# Altium PCB pcb.PcbDoc
Units mil, origin at the board's own origin, x right, y up, seen from the top; angles counter-clockwise.
Board outline 5324.52 x 2707.83 mil, 4 copper layers (Top Layer, Internal Plane 1, Internal Plane 2, Bottom Layer); 43 components, 34 nets, 162 pads, 0 vias.
Unrouted connection lines stored in the file: 2.
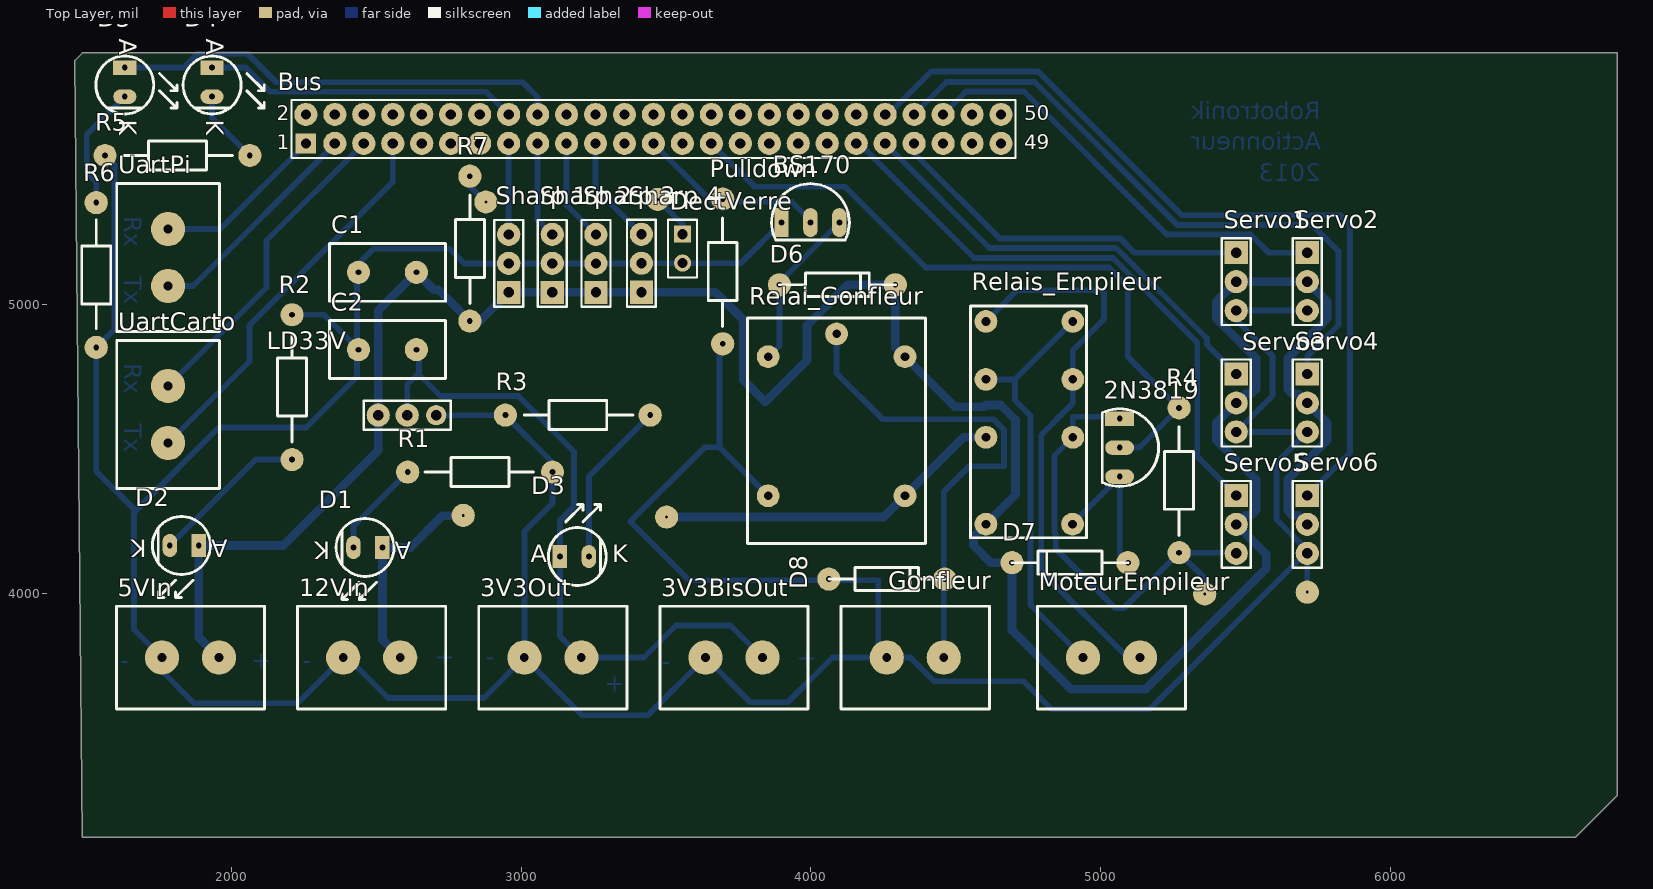
[diagram p0: Top Layer view]
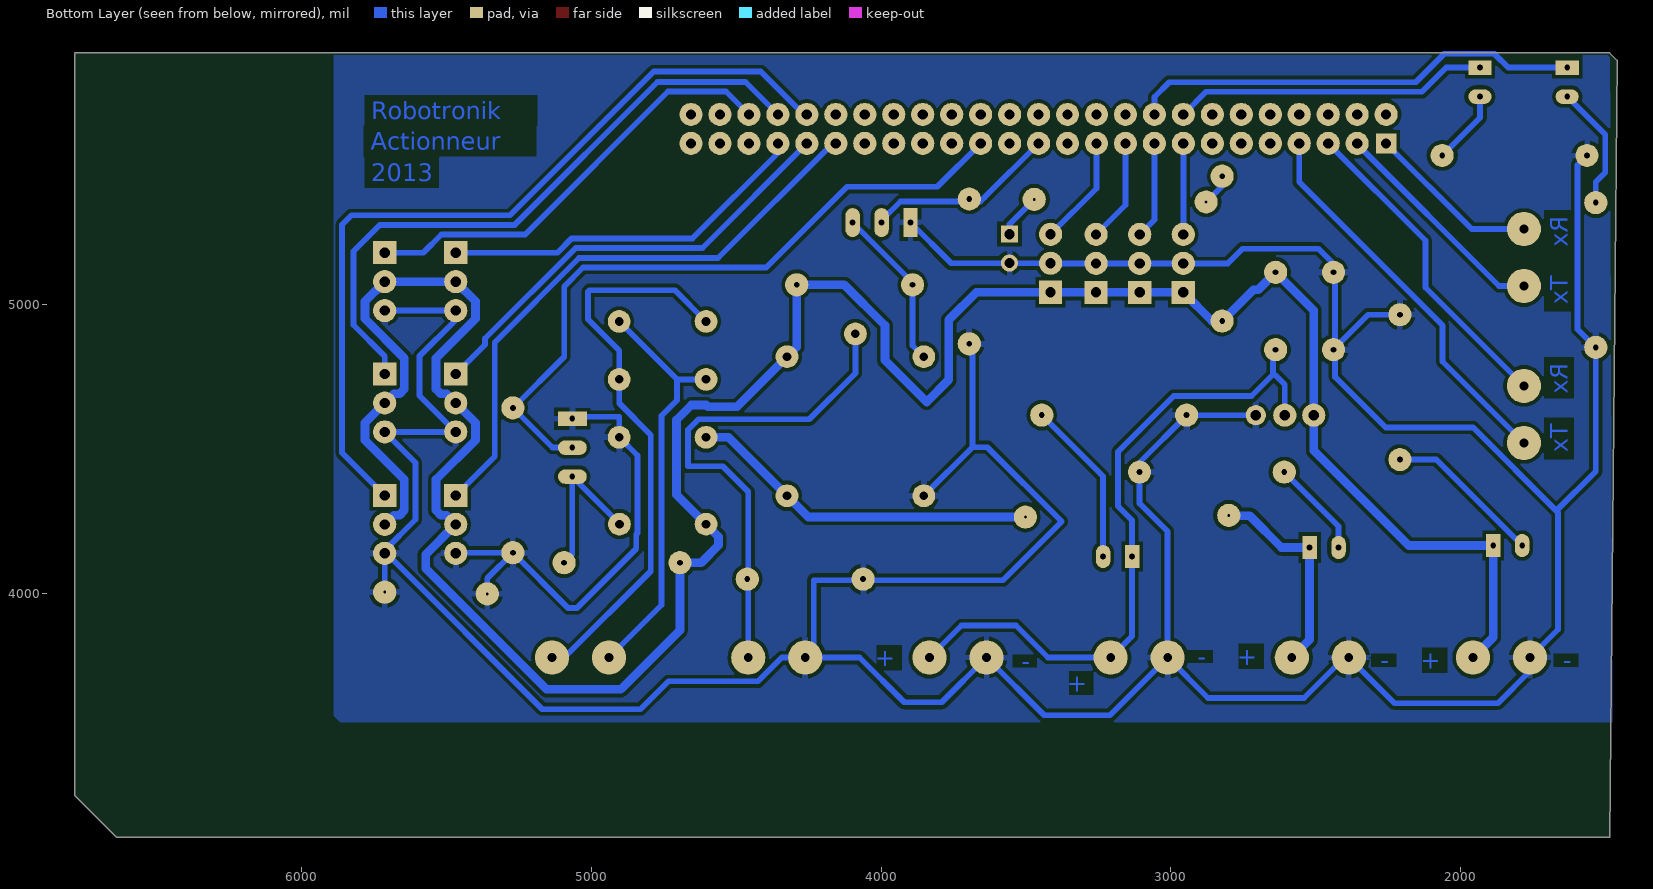
[diagram p1: Bottom Layer view, seen from below]
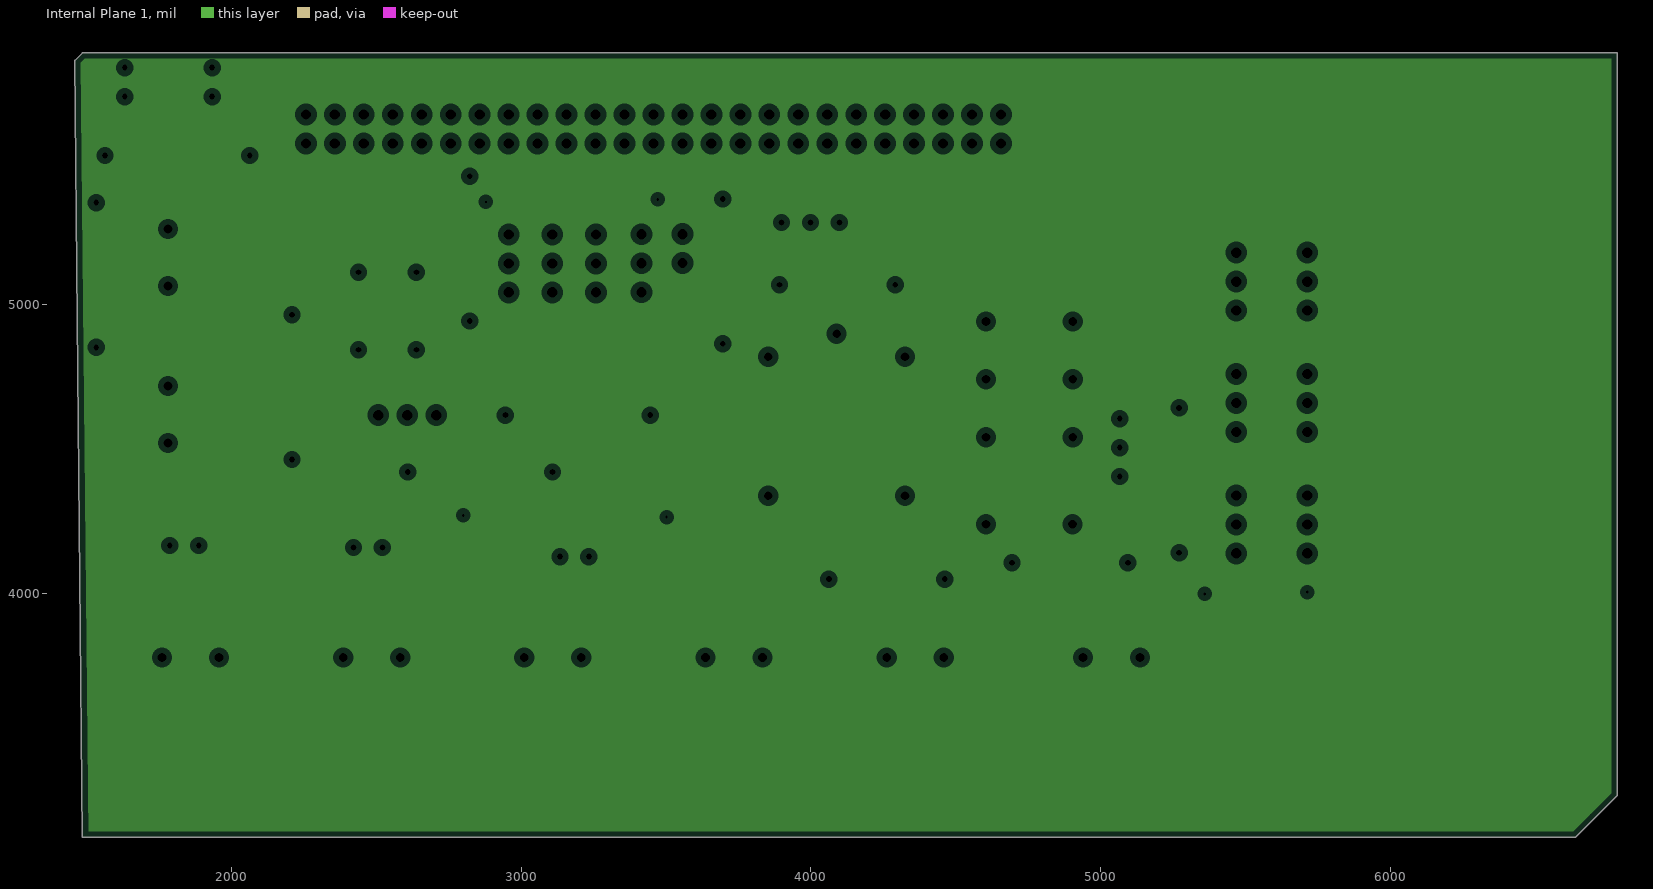
[diagram p2: Internal Plane 1, clearances drawn from the general rule]
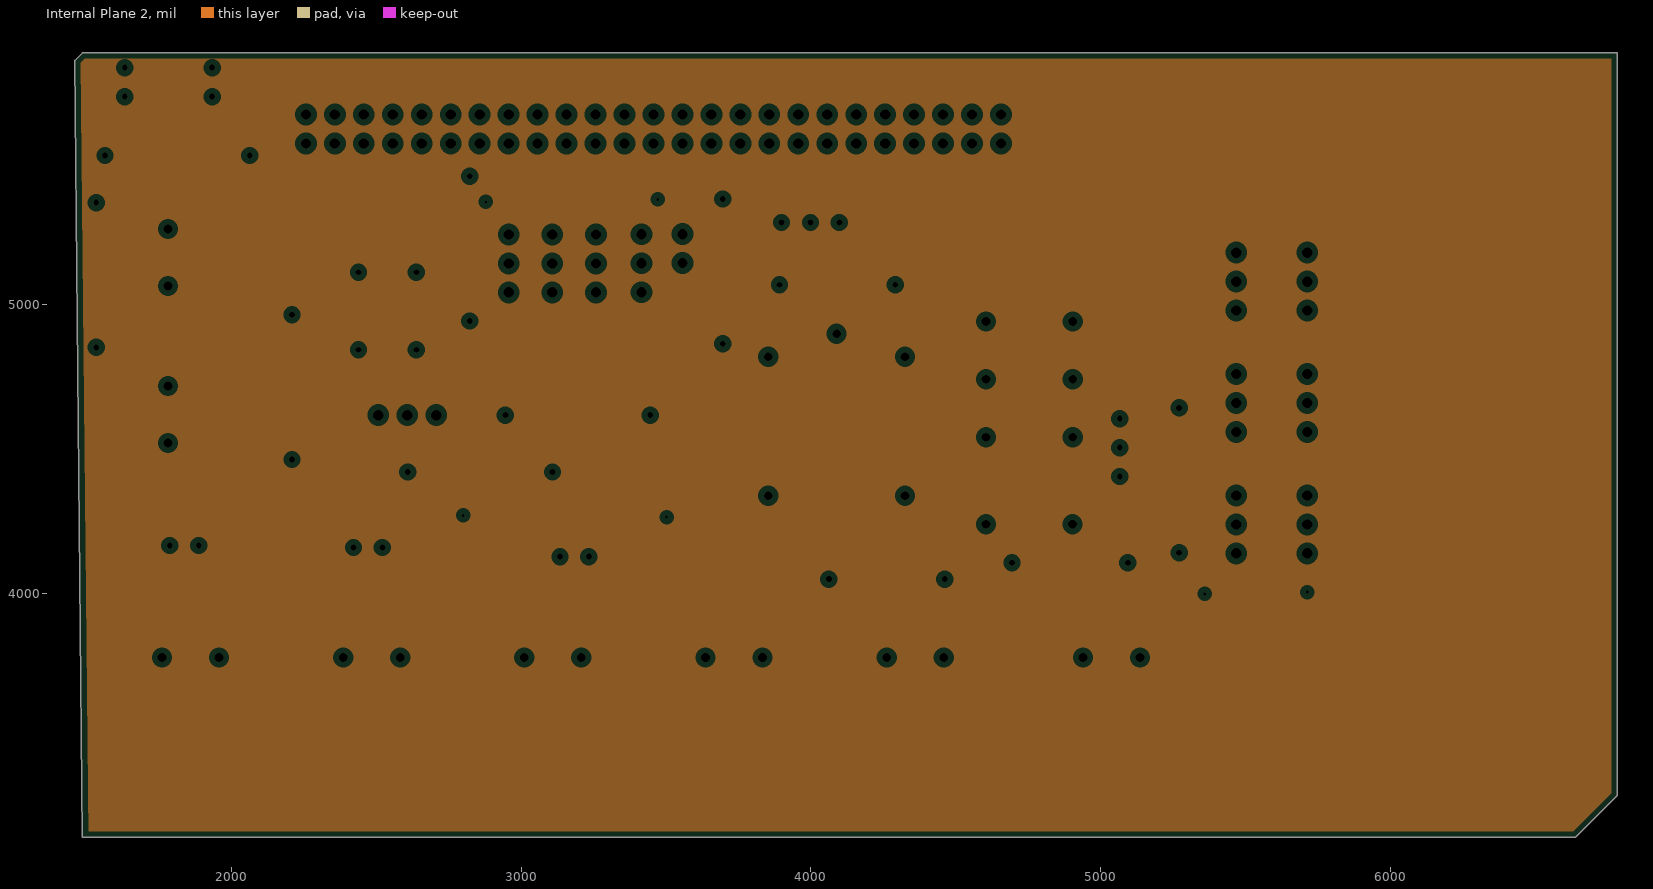
[diagram p3: Internal Plane 2, clearances drawn from the general rule]

## Layer stack, top to bottom
Top Layer: signal copper 1.4
Dielectric: dielectric 12.6, FR-4, Dk 4.8
Internal Plane 1: plane copper 1.4
Dielectric: dielectric 12.6, FR-4, Dk 4.8
Internal Plane 2: plane copper 1.4
Dielectric: dielectric 12.6, FR-4, Dk 4.8
Bottom Layer: signal copper 1.4

## Board outline
1458.72,5841.94 1484.76,5867.99 6783.23,5867.99 6783.23,3303.37 6705.12,3225.26 6640.02,3160.16 1484.75,3160.16

## Design rules (kind name [scope] priority, off if disabled: settings)
Clearance [All] p1: gap=13
FabricationTestPointUsage TestPointUsage [All] p1: valid=0 allowmultiple=FALSE
FabricationTestpoint Testpoint [All] p1: side=3 testpointundercomponent=TRUE minsize=40 maxsize=100 preferedsize=60 minholesize=0 maxholesize=40 preferedholesize=32 testpointgrid=1 allowsidetop=TRUE allowsidebottom=TRUE usegrid=TRUE gridtolerance=0.01
PlaneClearance [All] p1: clearance=20
PlaneConnect [All] p1: planeconnectstyle=Relief reliefexpansion=20 reliefentries=4 reliefconductorwidth=10 reliefairgap=10
PolygonConnect [All] p1: connectstyle=Relief reliefconductorwidth=20 reliefentries=4 polygonreliefangle="90 Angle"
RoutingLayers RoutingLayers_1 [All] p1: top layer_v5=FALSE bottom layer_v5=TRUE
RoutingVias [All] p1: holewidth=20 width=60 viastyle="Through Hole" minholewidth=20 minwidth=60 maxholewidth=20 maxwidth=60
SilkscreenOverComponentPads [All] p1: minsilkscreentomaskgap=10
SolderMaskExpansion [All] p1: expansion=4
Width Width_12V [InNet('12V')] p1: maxlimit=30 minlimit=30 preferedwidth=30
Width Default [Not InNet('12V') and Not InNet('5V')] p2: maxlimit=20 minlimit=20 preferedwidth=20
Width Width_5V [InNet('5V')] p3: maxlimit=30 minlimit=30 preferedwidth=30
22 further rules are at their usual default settings.

## Classes and differential pairs
net class Alim: 3V3 5V 12V GND
component class int-out: 3V3BisOut 3V3Out 5VIn 12VIn Bus D1 D2 D3 D4 D5 D8 DectVerre Gonfleur R1 R2 R3 R5 R6 R7 Servo1 Servo2 Servo3 Servo4 Servo5 Servo6 "Sharp 1" "Sharp 2" "Sharp 3" "Sharp 4" UartCarto UartPi
component class Sheet1: 2N3819 BS170 C1 C2 D6 D7 LD33V MoteurEmpileur Pulldown R4 Relai_Gonfleur Relais_Empileur
net class Undefined: 5V DECTVERRE GND NetDectVerre_1 "RX CARTO" RXPI "SHARP 1" "SHARP 2" "SHARP 3" "SHARP 4" "TX CARTO" TXPI

## Components (designator, comment, footprint, x,y, rotation, side; value= is the part's Value field where it differs from the comment)
2N3819 "2N3904" TO92 5065.88,4605.34 r270 top
3V3BisOut "Bornier" BORNIER 3636.05,3819.74 r0 top
3V3Out "Bornier" BORNIER 3010.47,3819.74 r0 top
5VIn "Bornier" BORNIER 1759.31,3819.74 r0 top
12VIn "Bornier" BORNIER 2384.89,3819.74 r0 top
BS170 "2N3904" TO92 3898.25,5282.42 r0 top
Bus "Header 25X2" HDR2X25 2256.13,5555.48 r0 top
C1 "Cap2" CAPA2 2437.77,5110.5 r0 top
C2 "Cap2" CAPA2 2437.77,4843.5 r0 top
D1 "TSUS5202" LED 2520.45,4160.56 r180 top
D2 "TSUS5202" LED 1886.47,4167.27 r180 top
D3 "TSUS5202" LED 3133.35,4128.97 r0 top
D4 "TSUS5202" LED 1932.3,5817.29 r270 top
D5 "TSUS5202" LED 1630.95,5817.29 r270 top
D6 "Diode 1N4001" Ddiode 4291.24,5067.48 r180 top
D7 "Diode 1N4001" Ddiode 4694.21,4107.85 r0 top
D8 "Diode 1N4001" Ddiode 4461.83,4051.39 r180 top
DectVerre "Header 2" HDR1X2 3556.73,5242.38 r270 top
Gonfleur "Bornier" BORNIER 4261.63,3819.74 r0 top
LD33V "Header 3" HDR1X3#1 2705.99,4617.27 r180 top
MoteurEmpileur "Bornier" Bornier 5136.25,3741 r180 top
Pulldown "Res2" res5_1/4W 3695.2,4863.64 r90 top
R1 "Res2" res5_1/4W 2607.62,4420.93 r0 top
R2 "Res2" res5_1/4W 2208.34,4464.03 r90 top
R3 "Res2" res5_1/4W 3444.95,4617.58 r180 top
R4 "Res2" res5_1/4W 5271,4142.32 r90 top
R5 "Res2" res5_1/4W 2062.63,5513.91 r180 top
R6 "Res2" res5_1/4W 1532.31,5351.14 r270 top
R7 "Res2" res5_1/4W 2822.26,4942.28 r90 top
Relai_Gonfleur "Relai_G5LA" Relai_g5la-1 4324.77,4819.3 r270 top
Relais_Empileur "Relais_MT2C93401" Relais_MT2C93401 4950.93,4194.08 r90 top
Servo1 "Header 3" HDR1X3#2 5468.35,5178.38 r270 top
Servo2 "Header 3" HDR1X3#2 5713.75,5178.37 r270 top
Servo3 "Header 3" HDR1X3#2 5468.35,4759.28 r270 top
Servo4 "Header 3" HDR1X3#2 5713.76,4759.28 r270 top
Servo5 "Header 3" HDR1X3#2 5468.35,4340.19 r270 top
Servo6 "Header 3" HDR1X3#2 5713.76,4340.19 r270 top
"Sharp 1" "Header 3" HDR1X3#2 2956.41,5041.28 r90 top
"Sharp 2" "Header 3" HDR1X3#2 3106.96,5041.28 r90 top
"Sharp 3" "Header 3" HDR1X3#2 3257.51,5041.28 r90 top
"Sharp 4" "Header 3" HDR1X3#2 3414.58,5041.77 r90 top
UartCarto "Bornier" BORNIER 1819.74,4718.26 r270 top
UartPi "Bornier" BORNIER 1819.74,5259.95 r270 top

## Footprints (in the part's own frame and the unit in brackets; to place one, negate y for a bottom-side part, rotate by r counter-clockwise, add the part's x,y. Pads: shape width x height; smd on the part's side, far side on the other; paste and mask are expansions set on the pad)
BORNIER [mm]
  round 3 hole 0.762: 1(0,-1) 2(5,-1)
  silkscreen extent -4,-5.5 9,3.5
Bornier [mm]
  round 3 hole 0.762: 1(0,-1) 2(5,-1)
  silkscreen extent -4,-5.5 9,3.5
CAPA2 [mil]
  round 80 hole 20: 1(0,0) 2(200,0)
  silkscreen extent -100,-100 300,100
Ddiode [mil]
  round 80 hole 20: A(400,0) K(0,0)
  silkscreen extent 0,-40 400,40
HDR1X2 [mm] "Connector; Header; 2 Position"
  rect 1.5x1.5 hole 0.9: 1(0,0)
  round 1.5 hole 0.9: 2(2.54,0)
  silkscreen extent -1.27,-1.27 3.81,1.27
HDR1X3#1 [mil] "Connector; Header; 3 Position"
  round 70 hole 35.43: 1(0,0)
  round 80 hole 35.43: 2(100,0) 3(200,0)
  silkscreen extent -50,-50 250,50
HDR1X3#2 [mil] "Connector; Header; 3 Position"
  rect 80x80 hole 35.43: 1(0,0)
  round 80 hole 35.43: 2(100,0) 3(200,0)
  silkscreen extent -50,-50 250,50
HDR2X25 [mil] "Connector; Header; 25x2 Position"
  rect 70x70 hole 35.43: 1(0,0)
  round 80 hole 35.43: 2(0,100) 3(100,0) 4(100,100) 5(200,0) 6(200,100) 7(300,0) 8(300,100) 9(400,0) 10(400,100) 11(500,0) 12(500,100) 13(600,0) 14(600,100) 15(700,0) 16(700,100) 17(800,0) 18(800,100) 19(900,0) 20(900,100) 21(1000,0) 22(1000,100) 23(1100,0) 24(1100,100) 25(1200,0) 26(1200,100) 27(1300,0) 28(1300,100) 29(1400,0) 30(1400,100) 31(1500,0) 32(1500,100) 33(1600,0) 34(1600,100) 35(1700,0) 36(1700,100) 37(1800,0) 38(1800,100) 39(1900,0) 40(1900,100) 41(2000,0) 42(2000,100) 43(2100,0) 44(2100,100) 45(2200,0) 46(2200,100) 47(2300,0) 48(2300,100) 49(2400,0) 50(2400,100)
  silkscreen extent -50,-50 2450,150
LED [mil]
  rect 50x80 hole 20: 1(0,0)
  oval 50x80 hole 20: 2(100,0)
  silkscreen extent -40,-100 160,180
Relai_g5la-1 [mm]
  round 2 hole 0.762: 1(0,0) 2(-2,-6) 3(0,-12) 4(12.2,-12) 5(12.2,0)
  silkscreen extent -3.4,-13.8 16.4,1.8
Relais_MT2C93401 [mm]
  round 2 hole 0.762: 1(1.19,1.21) 2(8.81,1.19) 3(13.89,1.19) 4(18.97,1.19) 5(18.97,8.81) 6(13.89,8.81) 7(8.81,8.81) 8(1.19,8.81)
  silkscreen extent 0,0 20.32,10.16
res5_1/4W [mil]
  round 80 hole 20: 1(0,0) 2(500,0)
  silkscreen extent 60,-50 435,50
TO92 [mil]
  rect 50x100 hole 20: 1(0,0)
  oval 50x100 hole 20: 2(100,0) 3(200,0)
  silkscreen extent -34,-60 234,134

## Part data
2N3819 BS170: "NPN General Purpose Amplifier"
3V3BisOut 3V3Out 5VIn 12VIn Gonfleur MoteurEmpileur UartCarto UartPi: library part Bornier2
Bus: "Header, 25-Pin, Dual row"
C1 C2: "Capacitor"
D1 D2 D3 D4 D5: "LED_IR"
D6 D7 D8: "1 Amp General Purpose Rectifier"
DectVerre: "Header, 2-Pin"
LD33V Servo1 Servo2 Servo3 Servo4 Servo5 Servo6 "Sharp 1" "Sharp 2" "Sharp 3" "Sharp 4": "Header, 3-Pin"
Pulldown R1 R2 R3 R4 R5 R6 R7: "Resistor"

## Free pads (board coordinates)
  round 80 hole 10: 0(2877.49,5353.36) 1(3471.08,5362.19) 3(3501.46,4265.58) 4(2799.36,4271.07) 6(5713.69,4006.06) 7(5359.5,4000.03)

## Nets (pads, with @x,y where several pads share a name; then routed paths per layer and width w, separated by ;. In a path a pad name is that pad's centre, name@x,y a point inside that pad or via, vN(x,y) a via of type N, cw(c..) or ccw(c..) an arc to the next point about the centre after c; other vN are vias at no path point)
3V3: 3V3BisOut.2 3V3Out.2 C2.2 D3.1 LD33V.2 | length 2365.5
  Bottom Layer w20: LD33V.2 2605.99,4723.11 2638.14,4755.26 ; C2.2 2646.7,4834.57 2646.7,4757.39 2720.79,4683.29 2989.66,4683.29 3182.01,4490.94 3182.01,4303.22 3133.35,4254.57 D3.1 3133.35,3854.34 3V3Out.2 3423.55,3780.37 3534.33,3891.15 3722.13,3891.15 3V3BisOut.2
5V: 5VIn.2 "Sharp 1.1" "Sharp 2.1" "Sharp 3.1" "Sharp 4.1" C1.2 D2.1 D6.K D7.K LD33V.3 R7.1 Relai_Gonfleur.1 Relais_Empileur.8 Servo1.2 Servo2.2 Servo3.2 Servo4.2 Servo5.2 Servo6.2 | length 9525.9
  Bottom Layer w30: 5VIn.2 1886.47,3850.07 D2.1 2178.16,4167.28 2505.99,4495.11 LD33V.3 2505.99,4978.72 C1.2 2697.81,5050.46 2714.08,5050.46 R7.1 2857.41,4942.28 2956.41,5041.29 3106.97,5041.29 3257.52,5041.29 3414.1,5041.29 ; 3414.58,5041.77 3670.53,5041.77 3766.05,4946.26 3766.05,4739.3 3842.44,4662.9 3986.05,4806.51 3986.05,4926.89 4126.64,5067.48 D6.K 4291.24,4852.82 Relai_Gonfleur.1 4497.51,4646.56 4598.73,4646.56 4604.49,4652.31 4654.24,4652.31 4706.08,4600.47 4706.08,4342.92 Relais_Empileur.8 4560.87,4197.71 4560.87,4167.82 4620.83,4107.85 D7.K 4694.21,3874.51 4898.18,3670.54 5154.84,3670.54 5572.29,4088 5572.29,4136.25 Servo5.2 5500.35,4272.19 5519.95,4272.19 5536.35,4288.6 5536.35,4395.12 5400.35,4531.12 5400.35,4591.28 Servo3.2 ; Servo3.2@5468.35,4648.38 Servo3.2 ; Servo1.2@5468.35,5067.47 Servo1.2 ; Servo6.2 5681.76,4272.19 5662.16,4272.19 5645.76,4288.6 5645.76,4395.12 5781.76,4531.12 5781.76,4591.28 Servo4.2 5681.76,4691.28 5662.16,4691.28 5645.76,4707.69 5645.76,4814.21 5781.76,4950.21 5781.76,5010.37 Servo2.2 ; Servo2.2@5713.76,5067.47 Servo2.2 ; Servo3.2 5500.35,4691.28 5519.95,4691.28 5536.35,4707.69 5536.35,4814.21 5400.35,4950.21 5400.35,5010.37 Servo1.2 ; Servo1.2 Servo2.2
12V: 12VIn.2 D1.1 pad.3 pad.4 Relai_Gonfleur.5 Relais_Empileur.7 | length 1946.3
  Bottom Layer w30: 12VIn.2 2520.45,3841.67 D1.1 2617.23,4160.56 2726.7,4270.04 pad.4@2787.82,4270.04 ; pad.3@3489.96,4265.88 4251.67,4265.88 Relai_Gonfleur.5 4526.72,4540.93 Relais_Empileur.7
COMMANDEEMPILEUR: 2N3819.2 Bus.29 R4.2 | length 2396.9
  Bottom Layer w20: Bus.29 3805.89,5405.73 4117.36,5405.73 4396.15,5126.94 5028.74,5126.94 5094.04,5061.65 5094.04,4819.28 R4.2 5134.02,4505.34 2N3819.2
COMMANDEGONFLEUR: BS170.2 Bus.25 Pulldown.2 | length 659.6
  Bottom Layer w20: Bus.25 3456.59,5555.49 3643.27,5368.81 3656.66,5355.42 3932.78,5355.42 3998.25,5289.95 BS170.2
DEBUG1: Bus.16 D4.1 | length 1090.9
  Bottom Layer w20: D4.1 2048.36,5817.29 2131.83,5733.83 2877.79,5733.83 Bus.16
DEBUG2: Bus.18 D5.1 | length 1567.2
  Bottom Layer w20: D5.1 1834.78,5817.29 1882.78,5865.29 2055.36,5865.29 2153.82,5766.83 3004.94,5766.83 3056.13,5715.63 Bus.18
DECTVERRE: Bus.27
GND: 2N3819.1 3V3BisOut.1 3V3Out.1 5VIn.1 12VIn.1 "Sharp 1.2" "Sharp 2.2" "Sharp 3.2" "Sharp 4.2" BS170.1 C1.1 C2.1 D8.A DectVerre.2 Gonfleur.1 LD33V.1 pad.6 pad.7 Pulldown.1 R1.2 R2.2 R3.2 R4.1 R5.2 R6.2 Relai_Gonfleur.4 Relais_Empileur.2 Servo1.3 Servo2.3 Servo3.3 Servo4.3 Servo5.3 Servo6.3 | length 16570.8
  Bottom Layer w20: R5.2 1595.3,5481.23 1595.3,4914.14 R6.2 1532.3,4423.14 1668.36,4287.09 ; R2.2 2318.4,4964.03 C2.1@2432.43,4850 ; LD33V.1 2944.64,4617.27 3107.62,4454.29 R1.2 3107.62,4312.78 3010.47,4215.62 3V3Out.1 ; Pulldown.1@3684.46,4884.42 3684.46,4506.85 ; Relai_Gonfleur.4 3684.46,4506.85 ; BS170.1 3757.6,5141.77 3414.58,5141.77 3414.1,5141.29 3257.52,5141.29 3106.97,5141.29 2956.41,5141.29 2802.92,5141.29 2752.17,5192.04 2489.93,5192.04 2432.43,5134.53 C2.1@2432.43,4850 ; 2N3819.1 5059.7,4611.51 4904.08,4611.51 Relais_Empileur.2 4840.92,4477.77 4840.92,4210.95 4845.07,4206.8 4845.07,4156.48 5050.54,3951 5079.68,3951 R4.1 ; pad.7 5359.5,4053.82 R4.1 ; Servo5.3@5466.22,4142.32 R4.1 ; Servo6.3@5705.91,4140.19 Servo6.3@5707.78,4140.19 ; pad.6 5713.69,4140.13 Servo6.3 ; Servo2.3 Servo1.3 5468.35,4946.27 5593.99,4820.63 5593.99,4684.93 Servo3.3 Servo4.3 5607.76,4453.28 5607.76,4257.1 5713.76,4151.1 Servo6.3 ; 1668.36,4287.09 1955.7,4574.43 2257.31,4574.43 2432.43,4749.55 C2.1@2432.43,4850 ; 1668.36,4287.09 1662.27,4281 1662.27,3877.42 5VIn.1 1759.31,3733.91 1870.29,3622.93 2227.45,3622.93 12VIn.1 2399.54,3780.37 2539.24,3640.68 2870.78,3640.68 3V3Out.1 ; 3V3Out.1 3209.69,3581.15 3436.83,3581.15 3V3BisOut.1 3790.29,3626.14 3919.77,3626.14 4074.01,3780.37 Gonfleur.1 ; 3684.46,4506.85 3632.96,4506.85 3376.48,4250.37 3579.2,4047.65 4232.09,4047.65 4232.09,3809.92 Gonfleur.1 ; Gonfleur.1 4342.44,3780.37 4424.5,3698.32 4734.16,3698.32 4830.26,3602.21 5169.8,3602.21 Servo6.3@5707.78,4140.19 ; Servo6.3@5707.78,4140.19 Servo6.3
GONFLEURRELAI: D8.K Gonfleur.2 Relai_Gonfleur.2 | length 1737.3
  Bottom Layer w20: Relai_Gonfleur.2 4088.55,4762.36 4247.62,4603.3 4629.92,4603.3 4666.45,4566.76 4666.45,4440.7 4546.59,4440.7 4458.48,4352.59 Gonfleur.2
Net2N3819_3: 2N3819.3 D7.A Relais_Empileur.1 | length 500.9
  Bottom Layer w20: Relais_Empileur.1 4903.3,4242.75 2N3819.3 5065.88,4136.18
NetBS170_3: BS170.3 D6.A Relai_Gonfleur.3 | length 557.1
  Bottom Layer w20: Relai_Gonfleur.3 3891.24,4858.21 D6.A ; D6.A@3891.24,5075.41 BS170.3
NetD1_2: D1.2 R1.1 | length 337.9
  Bottom Layer w20: D1.2 2420.45,4233.76 R1.1
NetD2_2: D2.2 R2.1 | length 544.8
  Bottom Layer w20: D2.2 2083.22,4464.03 R2.1
NetD3_2: D3.2 R3.1 | length 576.3
  Bottom Layer w20: D3.2 3233.35,4405.98 R3.1
NetD4_2: D4.2 R5.1 | length 257.4
  Bottom Layer w20: D4.2 1932.3,5644.23 R5.1
NetD5_2: D5.2 R6.1 | length 434.2
  Bottom Layer w20: R6.1 1532.3,5422.46 1499.63,5455.14 1499.63,5586.21 1630.71,5717.29 D5.2
NetDectVerre_1: DectVerre.1 pad.0 pad.1 R7.2 | length 267.1
  Bottom Layer w20: R7.2 2822.26,5408.59 pad.0 ; pad.1 3556.73,5276.53 DectVerre.1
NetMoteurEmpileur_1: MoteurEmpileur.1 Relais_Empileur.3 Relais_Empileur.5 | length 1973.2
  Bottom Layer w20: Relais_Empileur.5 4711.76,5048.6 5006.17,5048.6 5011.59,5043.18 5011.59,4948.32 4904.08,4840.81 Relais_Empileur.3 4904.08,4658.18 4795.08,4549.18 4795.08,4078.74 5093.44,3780.37 MoteurEmpileur.1
NetMoteurEmpileur_2: MoteurEmpileur.2 Relais_Empileur.4 Relais_Empileur.6 | length 1440.9
  Bottom Layer w20: Relais_Empileur.6 4704.08,4740.93 ; Relais_Empileur.4 4704.08,4740.93 ; MoteurEmpileur.2 4758.07,3961.71 4758.07,4615.06 4704.08,4669.05 4704.08,4740.93
"RX CARTO": Bus.5 UartCarto.1 | length 1117.1
  Bottom Layer w20: UartCarto.1 2120.58,5058.47 2120.58,5219.94 Bus.5
RXPI: Bus.1 UartPi.1 | length 598.2
  Bottom Layer w20: UartPi.1@1780.37,5259.95 1960.6,5259.95 Bus.1
"SERVO 1": Bus.43 Servo1.1 | length 1287.6
  Bottom Layer w20: Bus.43 4356.13,5522.69 4651.07,5227.75 5067.94,5227.75 5117.32,5178.37 Servo1.1
"SERVO 2": Bus.46 Servo2.1 | length 1520.6
  Bottom Layer w20: Bus.46 4535.06,5734.42 4735.64,5734.42 5228.68,5241.37 5517.87,5241.37 5580.87,5178.37 Servo2.1
"SERVO 3": Bus.41 Servo3.1 | length 1554.5
  Bottom Layer w20: Bus.41 4616.87,5194.75 5054.27,5194.75 5367,4882.02 5367,4860.63 Servo3.1
"SERVO 4": Bus.44 Servo4.1 | length 2222.4
  Bottom Layer w20: Bus.44 4468.07,5767.42 4771.9,5767.42 5264.95,5274.37 5730.28,5274.37 5821.68,5182.98 5821.68,4928.24 5713.76,4820.31 Servo4.1
"SERVO 5": Bus.39 Servo5.1 | length 2046.3
  Bottom Layer w20: Bus.39 4167.04,5555.49 4562.58,5159.94 5042.41,5159.94 5334,4868.35 5334,4474.54 Servo5.1
"SERVO 6": Bus.42 Servo6.1 | length 2883.7
  Bottom Layer w20: Bus.42 4267.04,5655.49 4415.05,5803.49 4785.03,5803.49 5281.16,5307.37 5828.23,5307.37 5860.96,5274.64 5860.96,4487.4 Servo6.1 Servo6.1@5713.76,4337.12
"SHARP 1": "Sharp 1.3" Bus.15 | length 313.9
  Bottom Layer w20: 2956.13,5241.57 Bus.15
"SHARP 2": "Sharp 2.3" Bus.17 | length 335.3
  Bottom Layer w20: Bus.17 3056.13,5292.12 3106.97,5241.29
"SHARP 3": "Sharp 3.3" Bus.19 | length 356.2
  Bottom Layer w20: Bus.19 3156.13,5342.67 3257.52,5241.29
"SHARP 4": "Sharp 4.3" Bus.21 | length 379.3
  Bottom Layer w20: Bus.21 3256.13,5400.22 3414.58,5241.77
"TX CARTO": Bus.7 UartCarto.2 | length 1355.4
  Bottom Layer w20: UartCarto.2 2061.34,4802.38 2061.34,4927.37 2556.13,5422.17 Bus.7
TXPI: Bus.3 UartPi.2 | length 781.2
  Bottom Layer w20: UartPi.2 1866.28,5063.1 2356.13,5552.96 Bus.3
pads on no net: Bus.2 Bus.4 Bus.6 Bus.8 Bus.9 Bus.10 Bus.11 Bus.12 Bus.13 Bus.14 Bus.20 Bus.22 Bus.23 Bus.24 Bus.26 Bus.28 Bus.30 Bus.31 Bus.32 Bus.33 Bus.34 Bus.35 Bus.36 Bus.37 Bus.38 Bus.40 Bus.45 Bus.47 Bus.48 Bus.49 Bus.50

## Polygon pours and split planes (outlines as drawn)
GND on Bottom Layer "Plan de masse" (solid, remove dead copper, pour order 2): 1483.48,5852.78 1490.88,5860.17 5889.69,5860.17 5889.69,3579.58 5882.31,3572.2 5867.55,3557.43 1476.11,3557.43
no net on Internal Plane 1 (split plane): 6763.14,3311.7 6690.91,3239.47 6631.7,3180.26 1504.66,3180.26 1478.89,5833.7 1493.09,5847.89 6763.14,5847.89
no net on Internal Plane 2 (split plane): 6763.14,3311.7 6690.91,3239.47 6631.7,3180.26 1504.66,3180.26 1478.89,5833.7 1493.09,5847.89 6763.14,5847.89

## Other copper
Bottom Layer:
  text "Robotronik" at 5759.57,5639.15 h60
  text "Actionneur" at 5762.5,5533.41 h60
  text "2013" at 5759.57,5424.75 h60
  text "Rx" at 1629.23,5304.02 h60 r270
  text "Tx" at 1629.23,5098.14 h60 r270
  text "Rx" at 1629.23,4796.63 h60 r270
  text "Tx" at 1629.23,4587.08 h60 r270
  text "+" at 2701.66,3754.55 h60
  text "-" at 2876.4,3754.55 h60
  text "+" at 3951.69,3750.09 h60
  text "-" at 1615.17,3741.13 h60
  text "+" at 2067.69,3741.13 h60
  text "-" at 2244.67,3741.12 h60
  text "-" at 3483.97,3738.34 h60
  text "+" at 3288.59,3662.71 h60

## Text inside footprints (layer, text, board x,y; h text height)
Bus: Top Overlay "50" at 4736.13,5635.48 h50; Top Overlay "49" at 4736.13,5535.48 h50; Top Overlay "1" at 2156.13,5535.48 h50; Top Overlay "2" at 2156.13,5635.48 h50
D1: Top Overlay "A" at 2620.45,4180.56 h60 r180; Top Overlay "K" at 2340.45,4180.56 h60 r180
D2: Top Overlay "A" at 1986.47,4187.27 h60 r180; Top Overlay "K" at 1706.47,4187.27 h60 r180
D3: Top Overlay "A" at 3033.35,4108.97 h60; Top Overlay "K" at 3313.35,4108.97 h60
D4: Top Overlay "A" at 1912.3,5917.29 h60 r270; Top Overlay "K" at 1912.3,5637.29 h60 r270
D5: Top Overlay "A" at 1610.95,5917.29 h60 r270; Top Overlay "K" at 1610.95,5637.29 h60 r270